# Altium PCB PCB_SON.PcbDoc
Units mm, origin at the board's own origin, x right, y up, seen from the top; angles counter-clockwise.
Board outline 50.04 x 50.04 mm, 2 copper layers (Top Layer, Bottom Layer); 10 components, 18 nets, 33 pads, 5 vias.
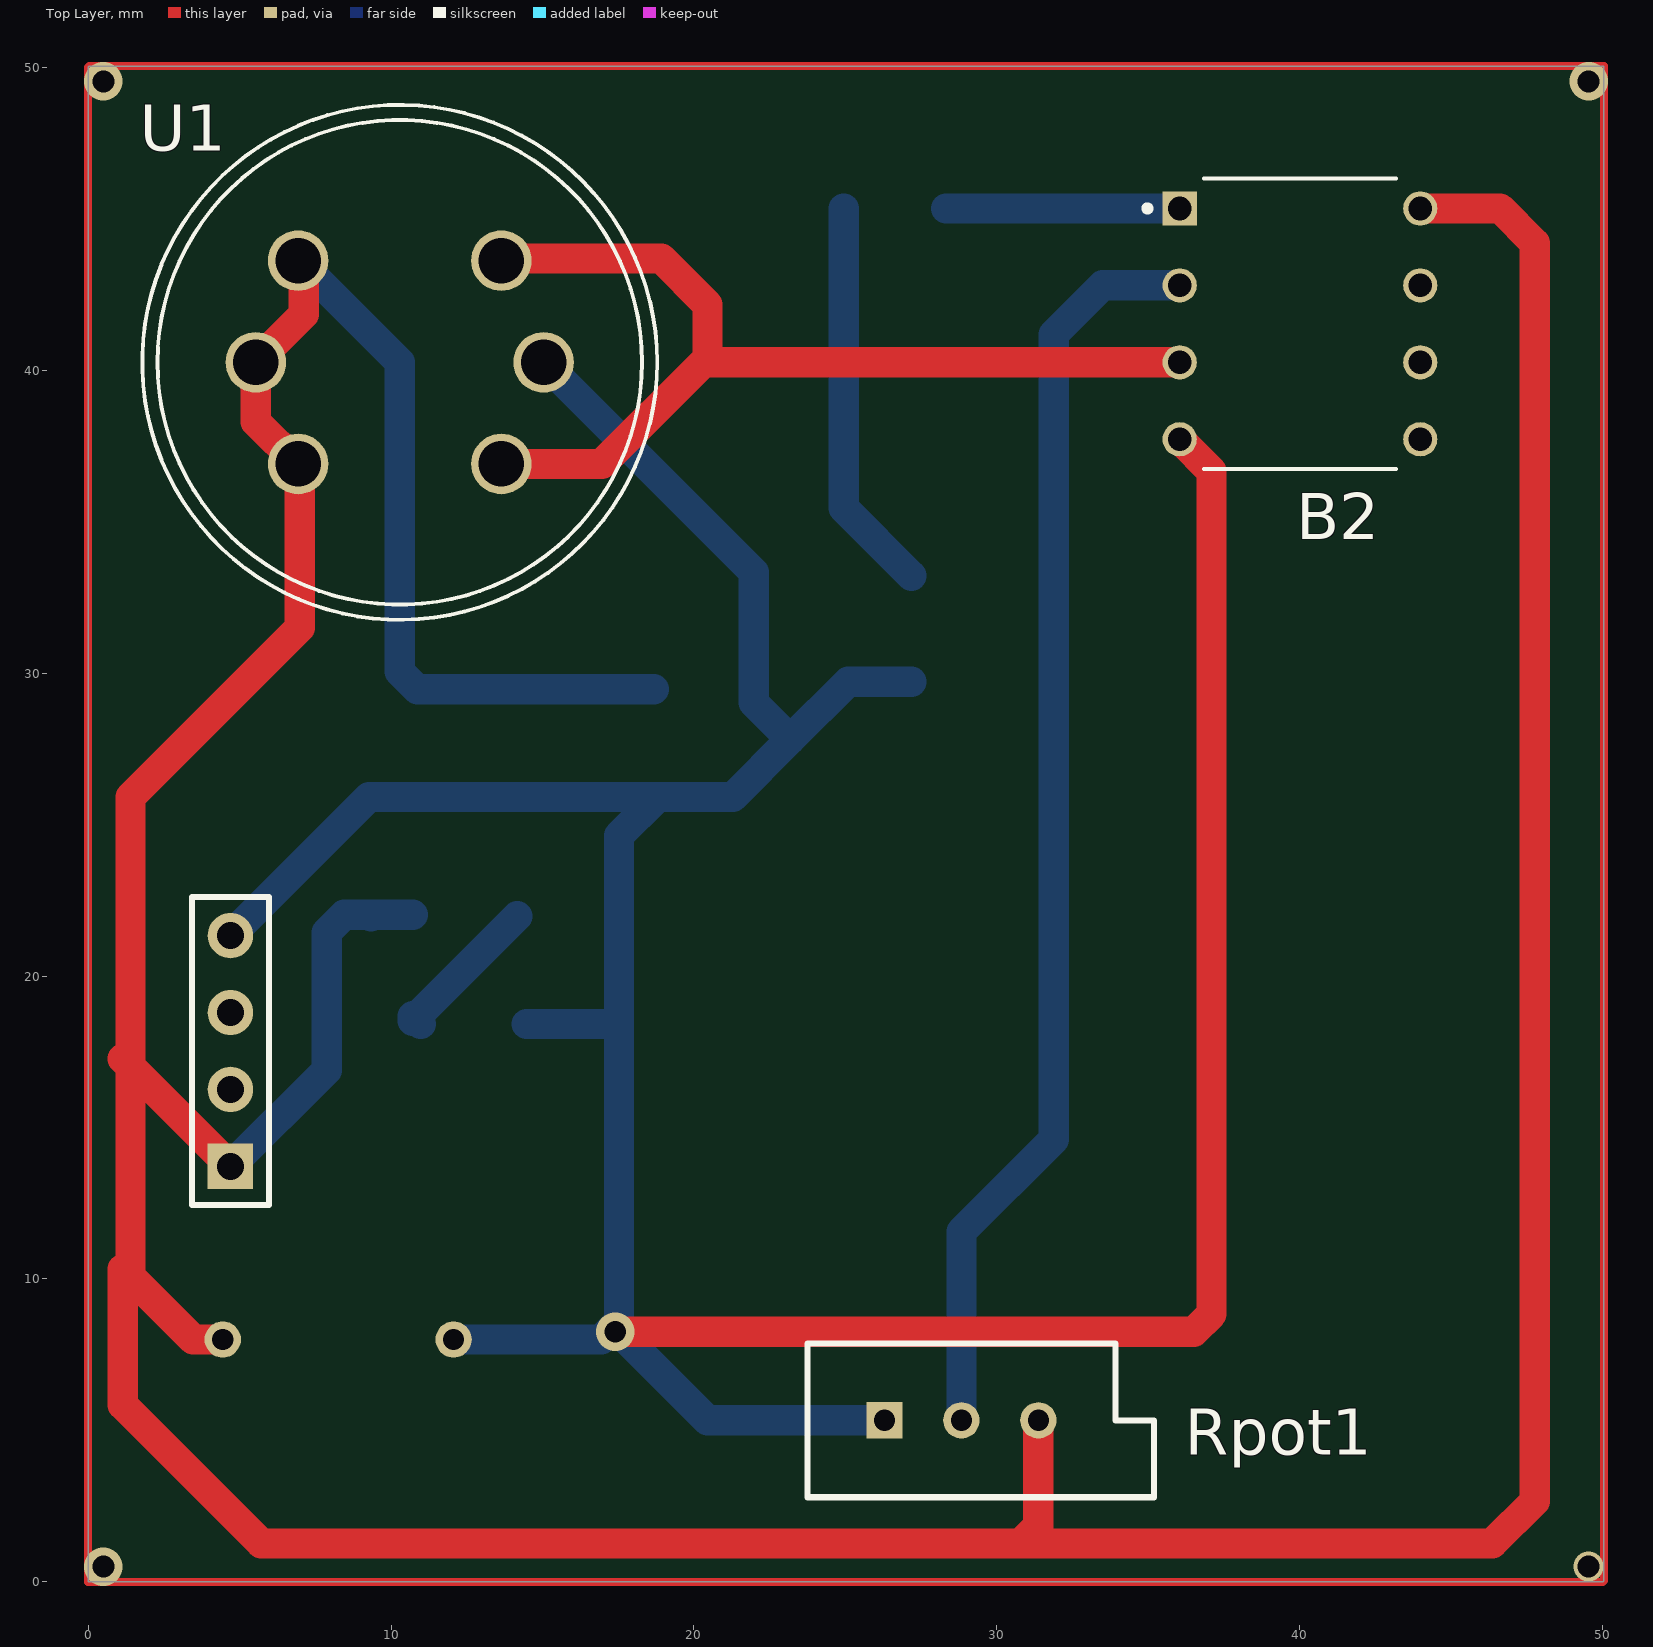
[diagram p0: Top Layer view]
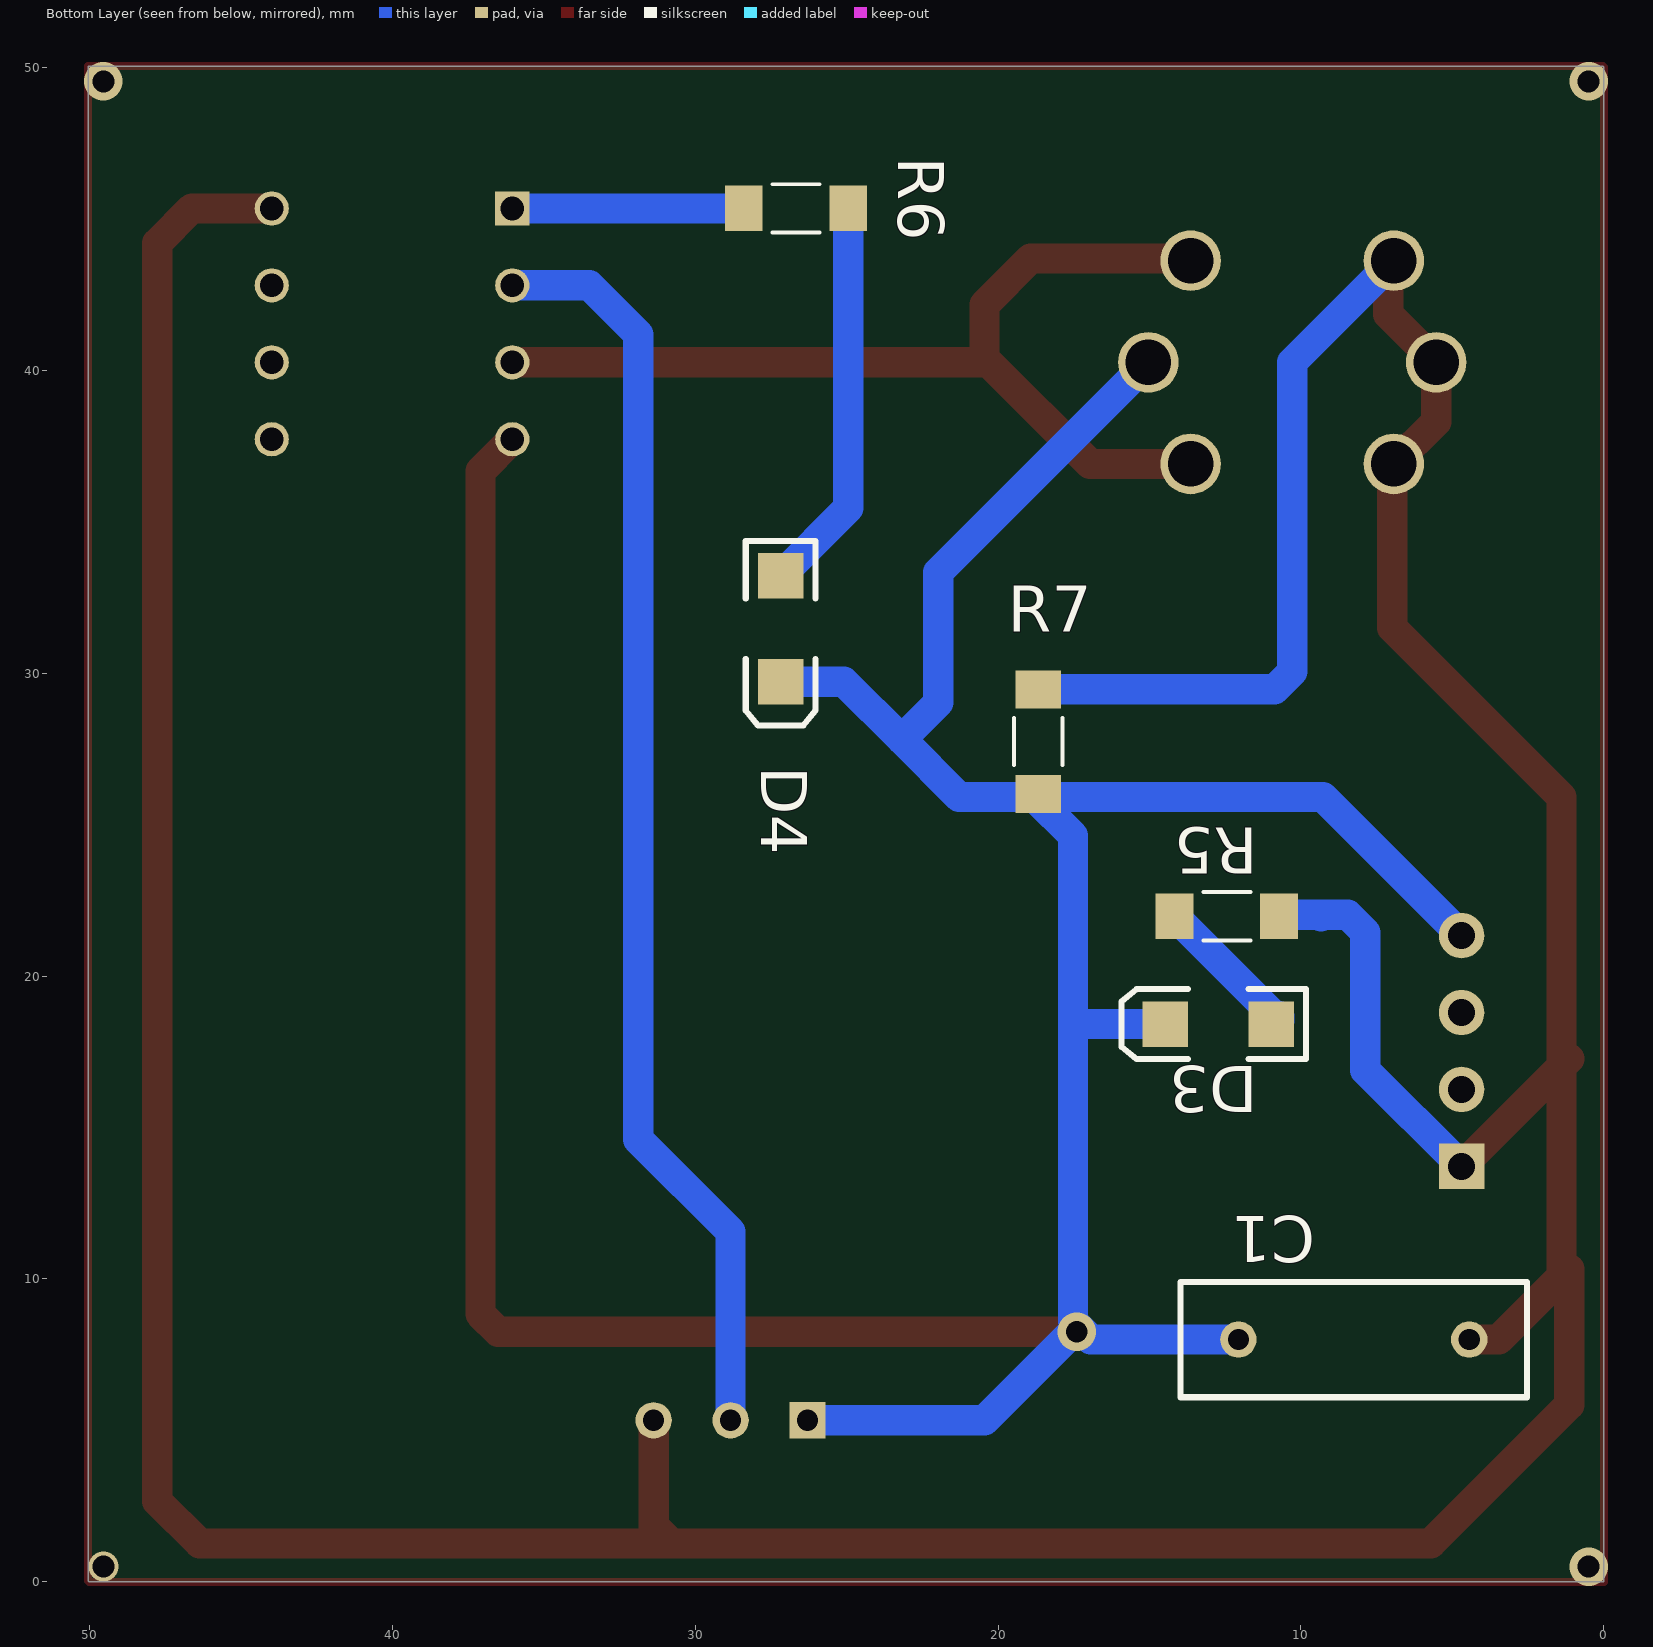
[diagram p1: Bottom Layer view, seen from below]

## Layer stack, top to bottom
Top Solder: solder mask 0.0102, Solder Resist, Dk 3.5
Top Layer: signal copper 0.0356
Dielectric 1: dielectric 0.32, FR-4, Dk 4.8
Bottom Layer: signal copper 0.0356
Bottom Solder: solder mask 0.0102, Solder Resist, Dk 3.5

## Board outline
0,0 50,0 50.038,0.038 50.038,50.038 0.038,50.038 0,50

## Design rules (kind name [scope] priority, off if disabled: settings)
Clearance [All] p1: gap=0.254 ignorepadtopadclearanceinfootprint=FALSE except(0: Arc-Hole Track-Hole SMDPad-Hole THPad-Hole Via-Hole Fill-Hole Poly-Hole Region-Hole Text-Hole)
PolygonConnect [All] p1: connectstyle=Relief reliefconductorwidth=0.254 reliefentries=4 polygonreliefangle="90 Angle" airgapwidth=0.254
RoutingVias [All] p1: holewidth=0.711 width=1.27 viastyle="Through Hole" minholewidth=0.711 minwidth=1.27 maxholewidth=0.711 maxwidth=1.27
SolderMaskExpansion [All] p1: expansion=0.102 istentingtop=FALSE
Width [All] p1: maxlimit=1 minlimit=0.256 preferedwidth=1 minimp=50.000000 maximp=50.000000 favimp=50.000000
30 further rules are at their usual default settings.

## Components (designator, comment, footprint, x,y, rotation, side; value= is the part's Value field where it differs from the comment)
B2 "LM358DE4" DIP794W45P254L959H508Q8 40.005,41.529 r0 top locked
C1 "Cap" RAD-0.3 8.255,8.001 r180 bottom value=0.1uF
D3 "LED2" 3.2X1.6X1.1 12.728,18.415 r0 bottom
D4 "LED2" 3.2X1.6X1.1 27.178,31.468 r270 bottom
P? "Header 4" HDR1X4 4.699,13.716 r90 top
R5 "ERA8APB751V" RES_ERA8APB751V 12.446,21.971 r180 bottom
R6 "330" RES_ERA8APB751V 26.67,45.339 r180 bottom
R7 "" RES_ERA8APB751V 18.669,27.739 r90 bottom
Rpot1 "" VR5 28.829,5.334 r0 top value=10K
U1 "DIP-GAS-MQ-9(6P-D19MM)" SNR6-D19.0MM 10.287,40.259 r90 top

## Footprints (in the part's own frame and the unit in brackets; to place one, negate y for a bottom-side part, rotate by r counter-clockwise, add the part's x,y. Pads: shape width x height; smd on the part's side, far side on the other; paste and mask are expansions set on the pad)
3.2X1.6X1.1 [mm] "SMT LED; 2 Flat Leads"
  rect 1.5x1.5 smd: 1(-1.75,0) 2(1.75,0)
  silkscreen extent -2.9,-1.15 3.2,1.15
DIP794W45P254L959H508Q8 [mm]
  rect 1.13x1.13 hole 0.78: 1(-3.97,3.81)
  round 1.13 hole 0.78: 2(-3.97,1.27) 3(-3.97,-1.27) 4(-3.97,-3.81) 5(3.97,-3.81) 6(3.97,-1.27) 7(3.97,1.27) 8(3.97,3.81)
  silkscreen extent -5.13,-4.79 3.17,4.79, body extent -3.94,-4.79 3.94,4.79, height 5.08
HDR1X4 [mm] "Connector; Header; 4 Position"
  rect 1.5x1.5 hole 0.9: 1(0,0)
  round 1.5 hole 0.9: 2(2.54,0) 3(5.08,0) 4(7.62,0)
  silkscreen extent -1.27,-1.27 8.89,1.27
RAD-0.3 [mm] "Radial Cap, Thru-Hole; 2 Leads; 0.3 in Pin Spacing"
  round 1.2 hole 0.7: 1(-3.81,0) 2(3.81,0)
  silkscreen extent -5.71,-1.91 5.71,1.91
RES_ERA8APB751V [mm]
  rect 1.25x1.5 smd: 1(-1.725,0) 2(1.725,0)
  silkscreen extent -0.78,-0.8 0.78,0.8
SNR6-D19.0MM [mm]
  round 2 hole 1.5: 1(-3.355,3.355) 2(-3.355,-3.355) 3(3.355,3.355) 4(3.355,-3.355) 5(0,4.75) 6(0,-4.75)
  silkscreen extent -8.5,-8.5 8.5,8.5
VR5 [mm] "Thru-Hole; 3 Leads"
  rect 1.2x1.2 hole 0.7: 1(-2.54,0)
  round 1.2 hole 0.7: 2(0,0) 3(2.54,0)
  silkscreen extent -5.08,-2.54 6.35,2.54

## Part data
B2: "Operational Amplifiers - Op Amps Dual General-Purpose Op Amp", Manufacturer_Name="Texas Instruments", Mouser Part Number=595-LM358DE4, Arrow Part Number=LM358DE4, Arrow Price/Stock=https://www.arrow.com/en/products/lm358de4/texas-instruments, Datasheet Link=https://www.ti.com/lit/ds/symlink/lm358.pdf?HQS=dis-dk-null-digikeymode-dsf-pf-null-wwe&ts=1639319952281&ref_url=https%253A%252F%252Fwww.ti.com%252Fgeneral%252Fdocs%252Fsuppproductinfo.tsp%253FdistId%253D10%2526gotoUrl%253Dhttps%253A%252F%252Fwww.ti.com%2, Geometry.Height=1.75mm, Manufacturer_Part_Number=LM358DE4, Mouser Price/Stock=https://www.mouser.com/Search/ProductDetail.aspx?qs=VBduBm9rCJQTkaX6SbhomQ%3d%3d
C1: "Capacitor", LatestRevisionDate=17-Jul-2002, LatestRevisionNote="Re-released for DXP Platform.", PackageDescription="Radial Cap, Thru-Hole; 2 Leads; 0.3 in Pin Spacing", PackageReference=RAD-0.3, Published=8-Jun-2000, Publisher="Altium Limited"
D3 D4: "Typical RED, GREEN, YELLOW, AMBER GaAs LED", LatestRevisionDate=17-Jul-2002, LatestRevisionNote="Re-released for DXP Platform.", PackageDescription="SM LED; 2 Flat Leads", PackageReference=3.2X1.6X1.1, PackageVersion=Feb-2002, Published=8-Jun-2000, Publisher="Altium Limited"
P?: "Header, 4-Pin", LatestRevisionDate=17-Jul-2002, LatestRevisionNote="Re-released for DXP Platform.", Publisher="Altium Limited"
R5: Package=None, Availability=Unavailable, MP=ERA8APB751V, Price=None
R6 R7: library part ERA8APB751V, Package=None, Availability=Unavailable, MP=ERA8APB751V, Price=None
Rpot1: library part RPot, "Potentiometer", LatestRevisionDate=17-Jul-2002, LatestRevisionNote="Re-released for DXP Platform.", PackageDescription="Variable Resistor, Thru-Hole; 3 Leads", PackageReference=VR5, Published=8-Jun-2000, Publisher="Altium Limited", Set Position=0.5, Sim Note="Enter the Resistance value and the set point into parameter fields."
U1: "47ÂµF Â±20% 6.3V Ceramic Capacitor X5R 0805 _2012 Metric_", Package="0805 Mac8", Availability=Unavailable, MF="Samsung Electro-Mechanics", MP=MQ-9, Price=None, SnapEDA_Link=https://www.snapeda.com/parts/MQ-9/Samsung%20Electro-Mechanics/view-part/106079/?ref=snap

## Via types
v1: diameter 1.27, hole 0.711, Top Layer to Bottom Layer, 4 vias
v2: diameter 1, hole 0.711, Top Layer to Bottom Layer, 1 vias

## Nets (pads, with @x,y where several pads share a name; then routed paths per layer and width w, separated by ;. In a path a pad name is that pad's centre, name@x,y a point inside that pad or via, vN(x,y) a via of type N, cw(c..) or ccw(c..) an arc to the next point about the centre after c; other vN are vias at no path point)
GND: 
NetB1_1: 
NetB1_2: 
NetB1_3: 
NetB1_8: 
NetB2_1: 
NetB2_2: 
NetB2_3: 
NetB2_4: 
NetB2_8: 
NetC1_1: 
NetD1_1: 
NetD2_1: 
NetD3_1: 
NetD4_1: 
NetP1_2: 
NetP1_6: 
NetP2_2: 
pads on no net: B2.1 B2.2 B2.3 B2.4 B2.5 B2.6 B2.7 B2.8 C1.1 C1.2 D3.1 D3.2 D4.1 D4.2 P?.1 P?.2 P?.3 P?.4 R5.1 R5.2 R6.1 R6.2 R7.1 R7.2 Rpot1.1 Rpot1.2 Rpot1.3 U1.1 U1.2 U1.3 U1.4 U1.5 U1.6
copper on no net: | length 614.8
  Top Layer w0.256: 0,50 0,0 50,0 50.038,0.038 50.038,49.53 50.038,50.038 49.53,50.038 0.038,50.038
  Top Layer w1: 1.143,17.272 4.699,13.716 ; 1.397,10.076 1.397,17.018 1.397,25.908 6.985,31.496 6.985,36.904 ; 4.445,8.001 3.472,8.001 1.143,10.33 1.143,5.842 5.715,1.27 30.783,1.27 ; 6.932,36.904 5.537,38.299 5.537,40.259 7.123,41.845 7.123,43.423 6.932,43.614 ; 13.642,36.904 16.965,36.904 20.32,40.259 35.941,40.259 ; 13.642,43.614 13.716,43.688 18.923,43.688 20.447,42.164 20.447,40.259 ; v1(17.399,8.255) 36.498,8.255 37.084,8.841 37.084,36.67 36.035,37.719 ; 31.369,5.334 31.369,1.856 30.783,1.27 ; 43.975,45.339 46.609,45.339 47.752,44.196 47.752,2.667 46.355,1.27 30.783,1.27
  Bottom Layer w1: 4.699,13.716 7.874,16.891 7.874,21.439 8.46,22.025 10.721,22.025 ; 4.699,21.336 9.271,25.908 18.796,25.908 17.523,24.635 17.523,18.415 ; 6.932,43.614 10.287,40.259 10.287,30.05 10.873,29.464 18.669,29.464 ; 9.288,22.025 9.342,21.971 ; 10.978,18.415 10.721,18.672 10.721,18.521 14.171,21.971 ; 12.065,8.001 16.94,8.001 17.526,8.587 17.526,17.161 17.523,17.164 17.523,18.415 ; 14.478,18.415 17.523,18.415 ; 15.037,40.259 21.971,33.325 21.971,29.027 23.185,27.813 ; v1@17.526,8.255 20.447,5.334 26.289,5.334 ; 18.669,25.908 21.28,25.908 23.185,27.813 ; 24.945,45.339 24.945,35.451 27.178,33.218 ; 27.178,29.718 25.09,29.718 23.185,27.813 ; 28.321,45.339 36.035,45.339 ; 28.829,5.334 28.829,11.557 31.877,14.605 31.877,41.181 33.495,42.799 36.035,42.799
  other v1: 0.508,0.508 0.508,49.53 49.53,49.53
  other v2: 49.53,0.508